# Altium PCB pcb_corin.pcbdoc (part 1 of 2)
Units mil, origin at the board's own origin, x right, y up, seen from the top; angles counter-clockwise.
Board outline 13525.17 x 6011.41 mil, 2 copper layers (Top Layer, Bottom Layer); 275 components, 170 nets, 950 pads, 596 vias.
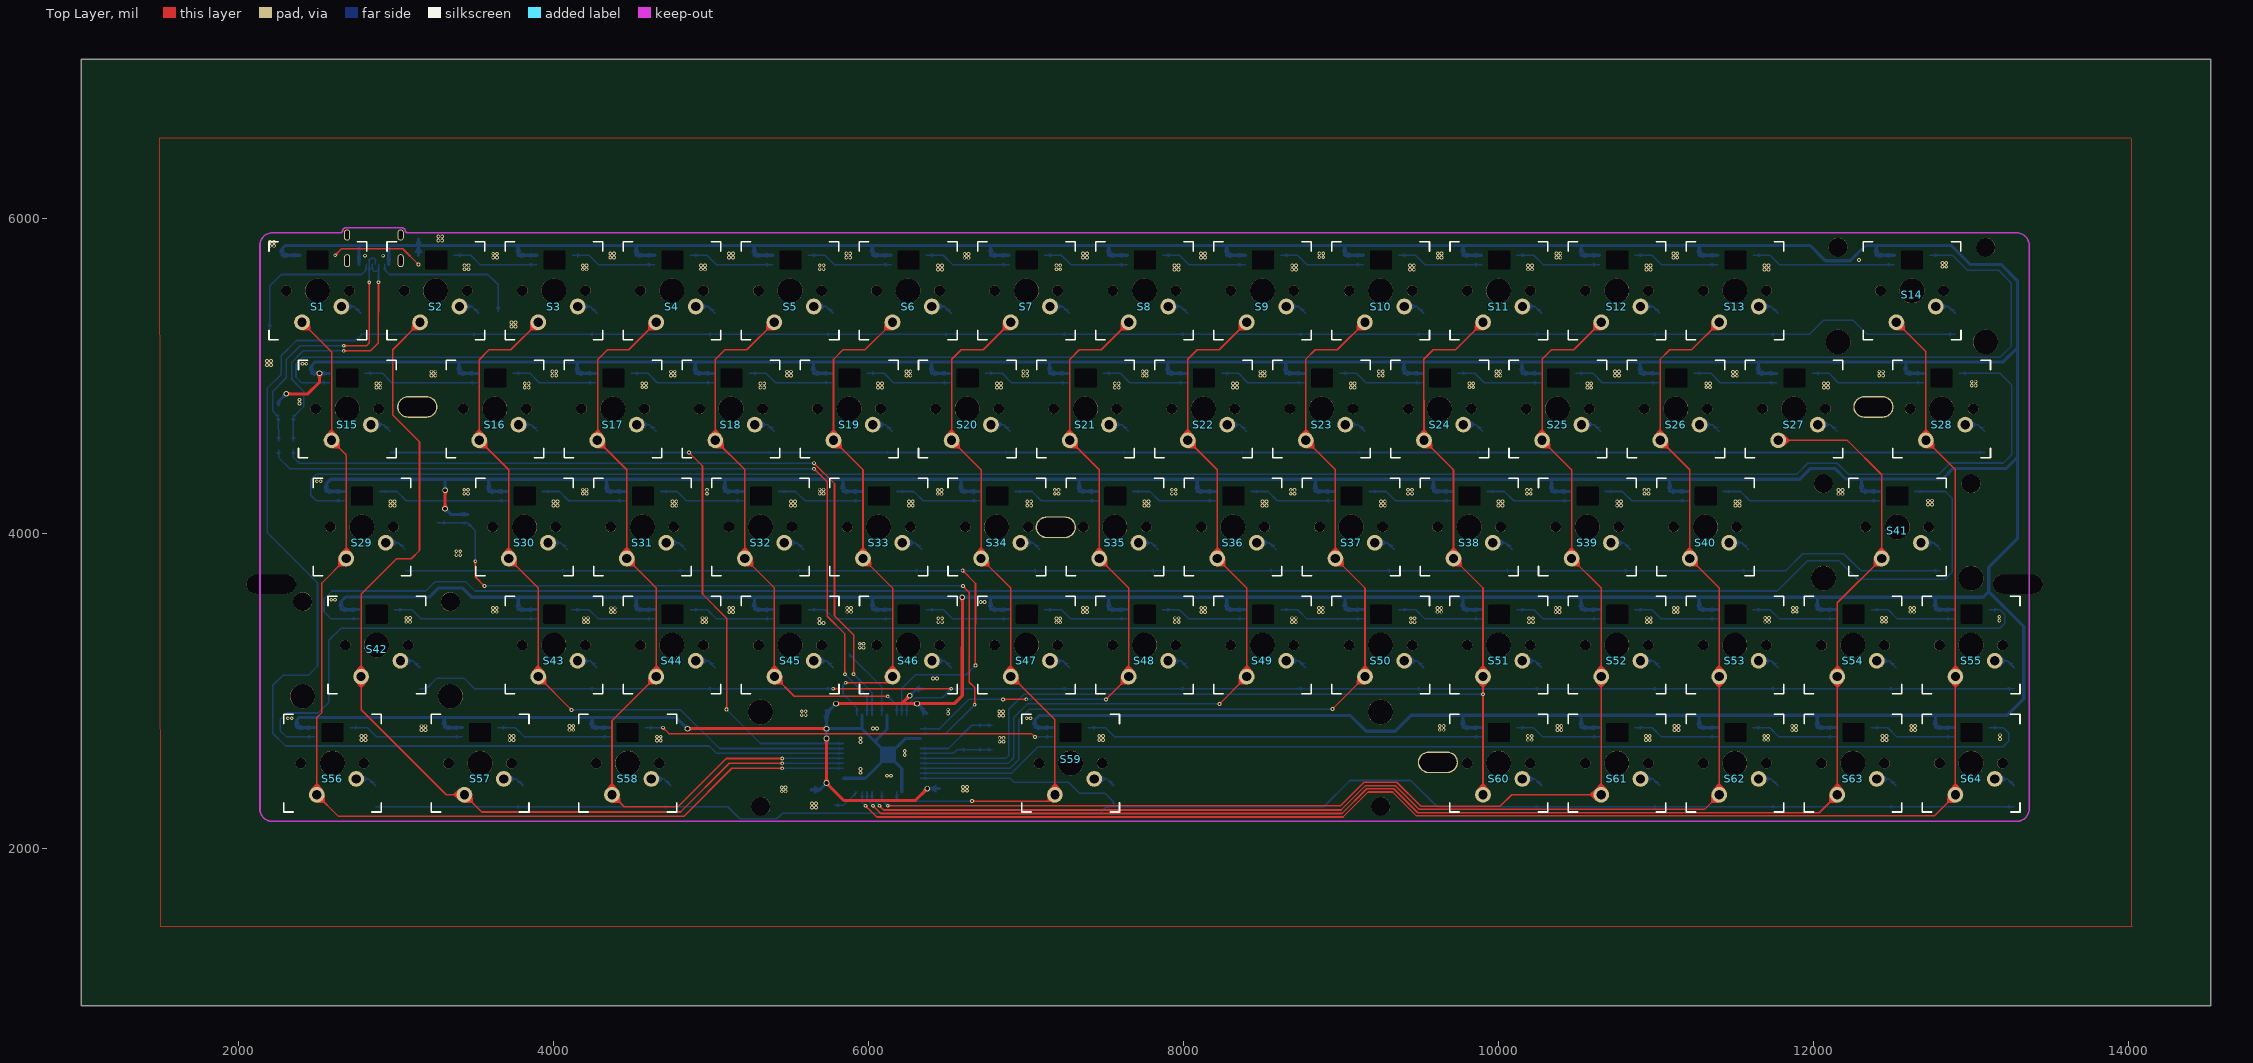
[diagram p0: Top Layer view]
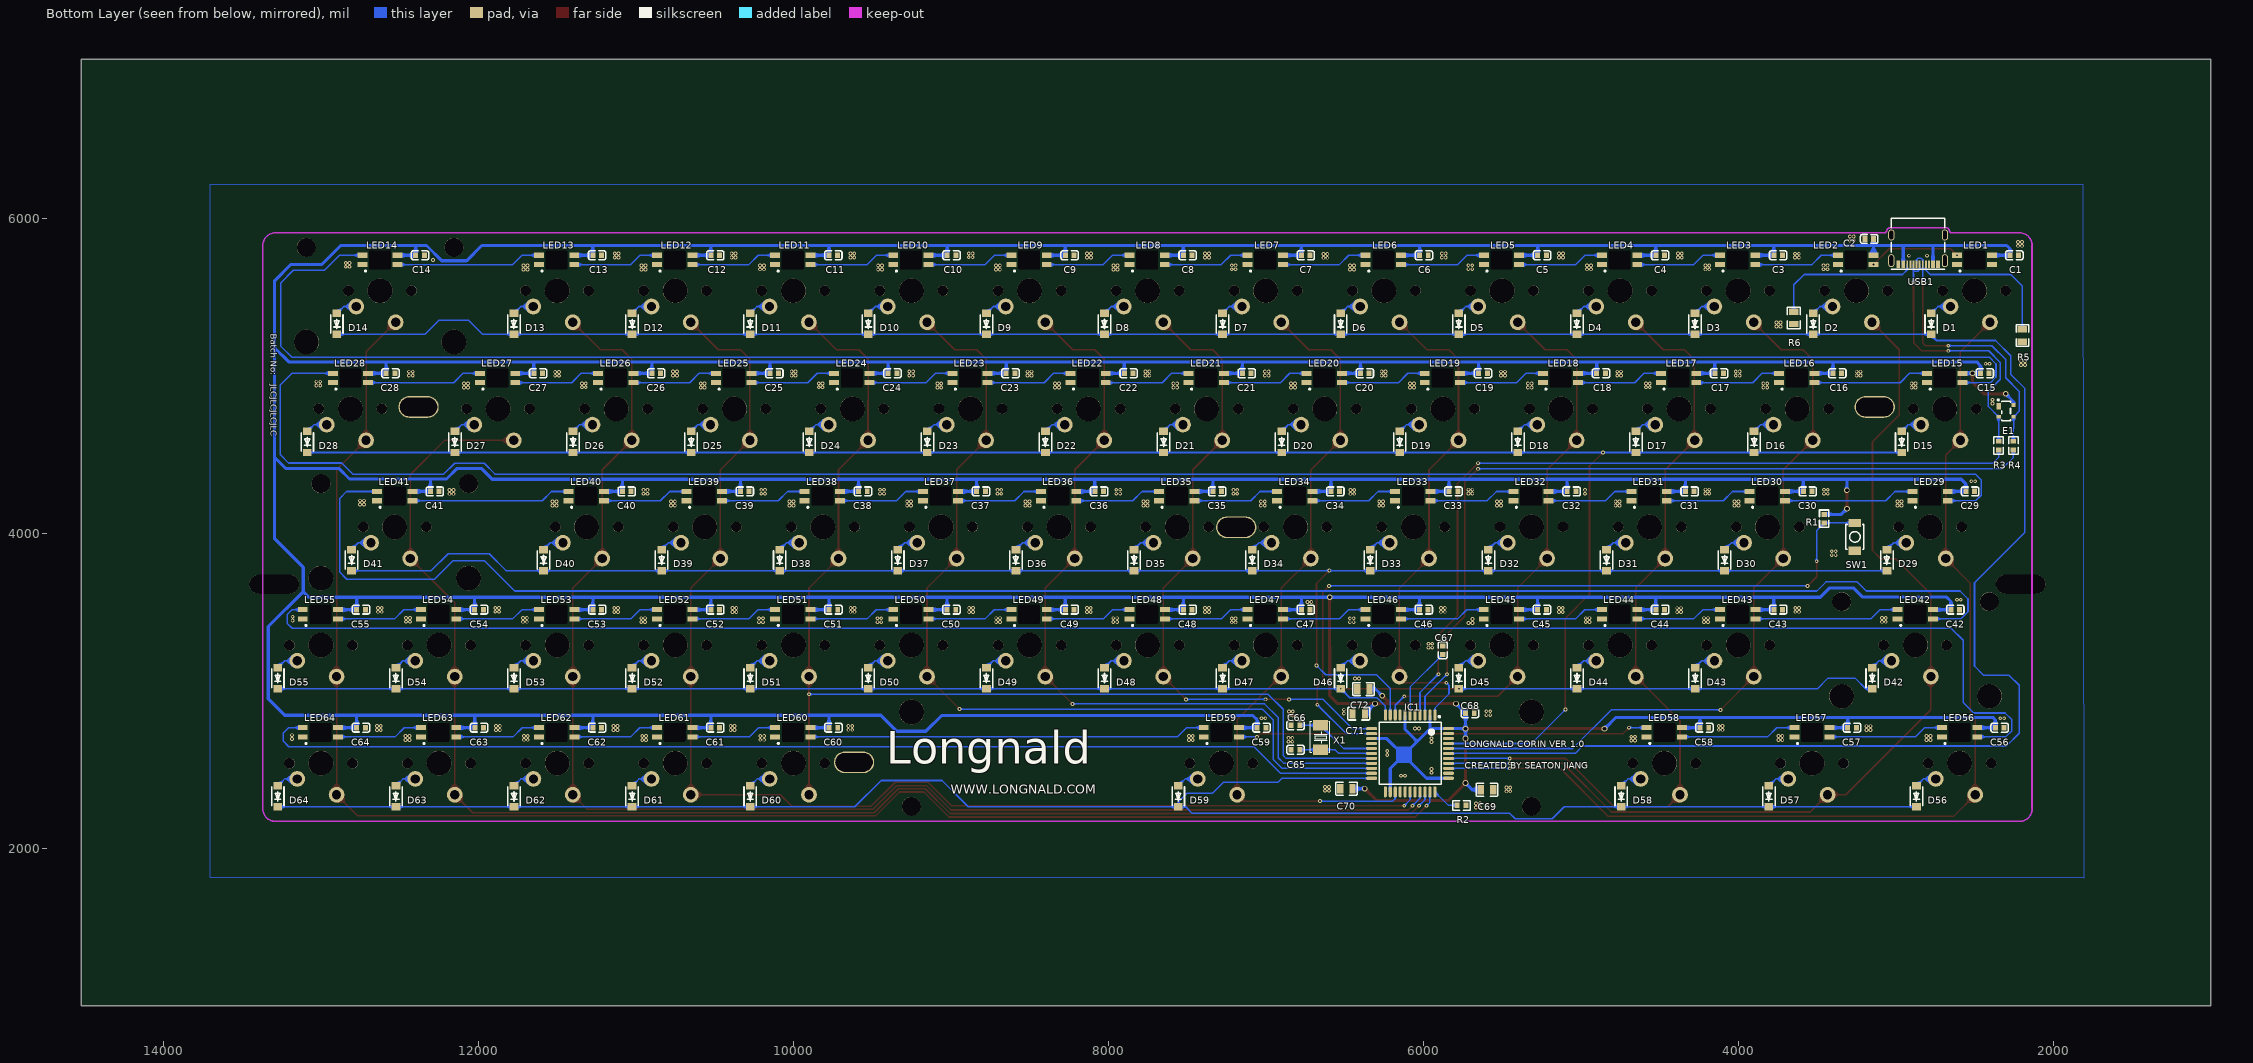
[diagram p1: Bottom Layer view, seen from below]

## Layer stack, top to bottom
Top Layer: signal copper (thickness not stored)
Dielectric: dielectric 12.6, FR-4, Dk 4.8
Bottom Layer: signal copper (thickness not stored)

## Board outline
14525.17,1000 1000,1000 1000,7011.41 14525.17,7011.41

## Components (designator, comment, footprint, x,y, rotation, side; value= is the part's Value field where it differs from the comment)
C1 "100nF" C0603 2248.03,5765.74 r180 bottom
C2 "100nF" C0603 3170.47,5868.89 r0 bottom
C3 "100nF" C0603 3748.03,5765.74 r180 bottom
C4 "100nF" C0603 4497.63,5765.74 r180 bottom
C5 "100nF" C0603 5247.63,5765.74 r180 bottom
C6 "100nF" C0603 5997.63,5765.74 r180 bottom
C7 "100nF" C0603 6748.02,5765.74 r180 bottom
C8 "100nF" C0603 7498.02,5765.74 r180 bottom
C9 "100nF" C0603 8247.62,5765.74 r180 bottom
C10 "100nF" C0603 8997.62,5765.74 r180 bottom
C11 "100nF" C0603 9748.01,5765.74 r180 bottom
C12 "100nF" C0603 10498.01,5765.74 r180 bottom
C13 "100nF" C0603 11248.01,5765.74 r180 bottom
C14 "100nF" C0603 12372.81,5765.74 r180 bottom
C15 "100nF" C0603 2435.43,5016.53 r180 bottom
C16 "100nF" C0603 3372.44,5016.53 r180 bottom
C17 "100nF" C0603 4122.83,5016.53 r180 bottom
C18 "100nF" C0603 4872.83,5016.53 r180 bottom
C19 "100nF" C0603 5622.83,5016.53 r180 bottom
C20 "100nF" C0603 6372.82,5016.53 r180 bottom
C21 "100nF" C0603 7122.82,5016.53 r180 bottom
C22 "100nF" C0603 7872.82,5016.53 r180 bottom
C23 "100nF" C0603 8622.82,5016.53 r180 bottom
C24 "100nF" C0603 9372.82,5016.53 r180 bottom
C25 "100nF" C0603 10122.82,5016.53 r180 bottom
C26 "100nF" C0603 10872.82,5016.53 r180 bottom
C27 "100nF" C0603 11622.82,5016.53 r180 bottom
C28 "100nF" C0603 12560.21,5016.53 r180 bottom
C29 "100nF" C0603 2529.13,4266.53 r180 bottom
C30 "100nF" C0603 3560.23,4266.53 r180 bottom
C31 "100nF" C0603 4310.23,4266.53 r180 bottom
C32 "100nF" C0603 5059.84,4266.53 r180 bottom
C33 "100nF" C0603 5810.23,4266.53 r180 bottom
C34 "100nF" C0603 6560.23,4266.53 r180 bottom
C35 "100nF" C0603 7310.22,4266.53 r180 bottom
C36 "100nF" C0603 8060.22,4266.53 r180 bottom
C37 "100nF" C0603 8810.22,4266.53 r180 bottom
C38 "100nF" C0603 9560.22,4266.53 r180 bottom
C39 "100nF" C0603 10310.22,4266.53 r180 bottom
C40 "100nF" C0603 11060.22,4266.53 r180 bottom
C41 "100nF" C0603 12279.11,4266.53 r180 bottom
C42 "100nF" C0603 2622.83,3515.74 r180 bottom
C43 "100nF" C0603 3747.63,3515.74 r180 bottom
C44 "100nF" C0603 4497.63,3515.74 r180 bottom
C45 "100nF" C0603 5248.02,3515.74 r180 bottom
C46 "100nF" C0603 5998.42,3515.74 r180 bottom
C47 "100nF" C0603 6748.02,3515.74 r180 bottom
C48 "100nF" C0603 7497.63,3515.74 r180 bottom
C49 "100nF" C0603 8247.62,3515.74 r180 bottom
C50 "100nF" C0603 8998.41,3515.74 r180 bottom
C51 "100nF" C0603 9747.62,3515.74 r180 bottom
C52 "100nF" C0603 10498.01,3515.74 r180 bottom
C53 "100nF" C0603 11247.62,3515.74 r180 bottom
C54 "100nF" C0603 11998.01,3515.74 r180 bottom
C55 "100nF" C0603 12747.61,3515.74 r180 bottom
C56 "100nF" C0603 2341.73,2765.74 r180 bottom
C57 "100nF" C0603 3279.13,2766.14 r180 bottom
C58 "100nF" C0603 4216.53,2766.14 r180 bottom
C59 "100nF" C0603 7029.12,2766.14 r180 bottom
C60 "100nF" C0603 9747.62,2766.14 r180 bottom
C61 "100nF" C0603 10498.01,2766.14 r180 bottom
C62 "100nF" C0603 11247.62,2766.14 r180 bottom
C63 "100nF" C0603 11997.62,2766.14 r180 bottom
C64 "100nF" C0603 12747.62,2766.14 r180 bottom
C65 "22pF" C0603 6812.98,2625.98 r180 bottom
C66 "22pF" C0603 6812.98,2781.1 r180 bottom
C67 "1uF" C0603 5878.73,3257.87 r90 bottom
C68 "1uF" C0603 5705.5,2857.87 r180 bottom
C69 "100nF" C0805 5597.24,2371.65 r180 bottom
C70 "100nF" C0805 6489.75,2378.34 r0 bottom
C71 "100nF" C0805 6411.41,2855.11 r0 bottom
C72 "100nF" C0805 6381.88,3011.02 r0 bottom
D1 "1N4148" SOD-123_L2.8-W1.8-LS3.7-RD 2776.38,5329.91 r270 bottom
D2 "1N4148" SOD-123_L2.8-W1.8-LS3.7-RD 3525.98,5329.91 r270 bottom
D3 "1N4148" SOD-123_L2.8-W1.8-LS3.7-RD 4276.37,5329.91 r270 bottom
D4 "1N4148" SOD-123_L2.8-W1.8-LS3.7-RD 5025.98,5329.91 r270 bottom
D5 "1N4148" SOD-123_L2.8-W1.8-LS3.7-RD 5775.98,5329.91 r270 bottom
D6 "1N4148" SOD-123_L2.8-W1.8-LS3.7-RD 6525.97,5329.91 r270 bottom
D7 "1N4148" SOD-123_L2.8-W1.8-LS3.7-RD 7276.37,5329.91 r270 bottom
D8 "1N4148" SOD-123_L2.8-W1.8-LS3.7-RD 8026.36,5329.91 r270 bottom
D9 "1N4148" SOD-123_L2.8-W1.8-LS3.7-RD 8775.97,5329.91 r270 bottom
D10 "1N4148" SOD-123_L2.8-W1.8-LS3.7-RD 9525.97,5329.91 r270 bottom
D11 "1N4148" SOD-123_L2.8-W1.8-LS3.7-RD 10276.36,5329.91 r270 bottom
D12 "1N4148" SOD-123_L2.8-W1.8-LS3.7-RD 11026.36,5329.91 r270 bottom
D13 "1N4148" SOD-123_L2.8-W1.8-LS3.7-RD 11776.36,5329.91 r270 bottom
D14 "1N4148" SOD-123_L2.8-W1.8-LS3.7-RD 12901.16,5329.91 r270 bottom
D15 "1N4148" SOD-123_L2.8-W1.8-LS3.7-RD 2963.78,4579.91 r270 bottom
D16 "1N4148" SOD-123_L2.8-W1.8-LS3.7-RD 3901.18,4579.91 r270 bottom
D17 "1N4148" SOD-123_L2.8-W1.8-LS3.7-RD 4651.18,4579.91 r270 bottom
D18 "1N4148" SOD-123_L2.8-W1.8-LS3.7-RD 5401.17,4579.91 r270 bottom
D19 "1N4148" SOD-123_L2.8-W1.8-LS3.7-RD 6151.17,4579.91 r270 bottom
D20 "1N4148" SOD-123_L2.8-W1.8-LS3.7-RD 6901.17,4579.91 r270 bottom
D21 "1N4148" SOD-123_L2.8-W1.8-LS3.7-RD 7651.17,4579.91 r270 bottom
D22 "1N4148" SOD-123_L2.8-W1.8-LS3.7-RD 8401.17,4579.91 r270 bottom
D23 "1N4148" SOD-123_L2.8-W1.8-LS3.7-RD 9151.17,4579.91 r270 bottom
D24 "1N4148" SOD-123_L2.8-W1.8-LS3.7-RD 9901.16,4579.91 r270 bottom
D25 "1N4148" SOD-123_L2.8-W1.8-LS3.7-RD 10651.16,4579.91 r270 bottom
D26 "1N4148" SOD-123_L2.8-W1.8-LS3.7-RD 11401.16,4579.91 r270 bottom
D27 "1N4148" SOD-123_L2.8-W1.8-LS3.7-RD 12151.16,4579.91 r270 bottom
D28 "1N4148" SOD-123_L2.8-W1.8-LS3.7-RD 13088.56,4579.91 r270 bottom
D29 "1N4148" SOD-123_L2.8-W1.8-LS3.7-RD 3057.48,3829.92 r270 bottom
D30 "1N4148" SOD-123_L2.8-W1.8-LS3.7-RD 4088.58,3829.92 r270 bottom
D31 "1N4148" SOD-123_L2.8-W1.8-LS3.7-RD 4838.18,3829.92 r270 bottom
D32 "1N4148" SOD-123_L2.8-W1.8-LS3.7-RD 5588.57,3829.92 r270 bottom
D33 "1N4148" SOD-123_L2.8-W1.8-LS3.7-RD 6338.57,3829.92 r270 bottom
D34 "1N4148" SOD-123_L2.8-W1.8-LS3.7-RD 7088.57,3829.92 r270 bottom
D35 "1N4148" SOD-123_L2.8-W1.8-LS3.7-RD 7838.57,3829.92 r270 bottom
D36 "1N4148" SOD-123_L2.8-W1.8-LS3.7-RD 8588.57,3829.92 r270 bottom
D37 "1N4148" SOD-123_L2.8-W1.8-LS3.7-RD 9338.57,3829.92 r270 bottom
D38 "1N4148" SOD-123_L2.8-W1.8-LS3.7-RD 10088.57,3829.92 r270 bottom
D39 "1N4148" SOD-123_L2.8-W1.8-LS3.7-RD 10838.56,3829.92 r270 bottom
D40 "1N4148" SOD-123_L2.8-W1.8-LS3.7-RD 11588.56,3829.92 r270 bottom
D41 "1N4148" SOD-123_L2.8-W1.8-LS3.7-RD 12807.46,3829.92 r270 bottom
D42 "1N4148" SOD-123_L2.8-W1.8-LS3.7-RD 3150.78,3079.92 r270 bottom
D43 "1N4148" SOD-123_L2.8-W1.8-LS3.7-RD 4275.59,3079.92 r270 bottom
D44 "1N4148" SOD-123_L2.8-W1.8-LS3.7-RD 5025.58,3079.92 r270 bottom
D45 "1N4148" SOD-123_L2.8-W1.8-LS3.7-RD 5775.98,3079.92 r270 bottom
D46 "1N4148" SOD-123_L2.8-W1.8-LS3.7-RD 6525.98,3079.92 r270 bottom
D47 "1N4148" SOD-123_L2.8-W1.8-LS3.7-RD 7276.37,3079.92 r270 bottom
D48 "1N4148" SOD-123_L2.8-W1.8-LS3.7-RD 8025.97,3079.92 r270 bottom
D49 "1N4148" SOD-123_L2.8-W1.8-LS3.7-RD 8775.97,3079.92 r270 bottom
D50 "1N4148" SOD-123_L2.8-W1.8-LS3.7-RD 9526.36,3079.92 r270 bottom
D51 "1N4148" SOD-123_L2.8-W1.8-LS3.7-RD 10275.97,3079.92 r270 bottom
D52 "1N4148" SOD-123_L2.8-W1.8-LS3.7-RD 11026.36,3079.92 r270 bottom
D53 "1N4148" SOD-123_L2.8-W1.8-LS3.7-RD 11775.96,3079.92 r270 bottom
D54 "1N4148" SOD-123_L2.8-W1.8-LS3.7-RD 12525.96,3079.92 r270 bottom
D55 "1N4148" SOD-123_L2.8-W1.8-LS3.7-RD 13275.96,3079.92 r270 bottom
D56 "1N4148" SOD-123_L2.8-W1.8-LS3.7-RD 2870.08,2329.92 r270 bottom
D57 "1N4148" SOD-123_L2.8-W1.8-LS3.7-RD 3807.08,2329.92 r270 bottom
D58 "1N4148" SOD-123_L2.8-W1.8-LS3.7-RD 4744.88,2329.92 r270 bottom
D59 "1N4148" SOD-123_L2.8-W1.8-LS3.7-RD 7557.47,2329.92 r270 bottom
D60 "1N4148" SOD-123_L2.8-W1.8-LS3.7-RD 10275.97,2329.92 r270 bottom
D61 "1N4148" SOD-123_L2.8-W1.8-LS3.7-RD 11026.36,2329.92 r270 bottom
D62 "1N4148" SOD-123_L2.8-W1.8-LS3.7-RD 11775.96,2329.92 r270 bottom
D63 "1N4148" SOD-123_L2.8-W1.8-LS3.7-RD 12525.96,2329.92 r270 bottom
D64 "1N4148" SOD-123_L2.8-W1.8-LS3.7-RD 13275.96,2329.92 r270 bottom
E1 "PRTR5V0U2X" SOT-143_L2.9-W1.3-P1.92-LS2.3-BL 2300.39,4776.77 r90 bottom
IC1 "ATMEGA32U4-AU" QFP-44_L10.0-W10.0-P0.80-LS13.2-BL 6085.42,2601.97 r180 bottom
LED1 "WS2812B" WS2812-3528 2501.18,5736.21 r0 top
LED2 "WS2812B" WS2812-3528 3255.24,5736.09 r0 top
LED3 "WS2812B" WS2812-3528 4005.64,5736.09 r0 top
LED4 "WS2812B" WS2812-3528 4755.24,5736.09 r0 top
LED5 "WS2812B" WS2812-3528 5505.24,5736.09 r0 top
LED6 "WS2812B" WS2812-3528 6255.24,5736.09 r0 top
LED7 "WS2812B" WS2812-3528 7005.63,5736.09 r0 top
LED8 "WS2812B" WS2812-3528 7755.63,5736.09 r0 top
LED9 "WS2812B" WS2812-3528 8505.23,5736.09 r0 top
LED10 "WS2812B" WS2812-3528 9255.24,5736.09 r0 top
LED11 "WS2812B" WS2812-3528 10005.63,5736.09 r0 top
LED12 "WS2812B" WS2812-3528 10755.62,5736.09 r0 top
LED13 "WS2812B" WS2812-3528 11505.62,5736.09 r0 top
LED14 "WS2812B" WS2812-3528 12627.14,5736.09 r0 top
LED15 "WS2812B" WS2812-3528 2689.76,4986.21 r0 top
LED16 "WS2812B" WS2812-3528 3630.44,4986.21 r0 top
LED17 "WS2812B" WS2812-3528 4380.44,4986.21 r0 top
LED18 "WS2812B" WS2812-3528 5130.44,4986.21 r0 top
LED19 "WS2812B" WS2812-3528 5880.44,4986.21 r0 top
LED20 "WS2812B" WS2812-3528 6630.44,4986.21 r0 top
LED21 "WS2812B" WS2812-3528 7380.43,4986.21 r0 top
LED22 "WS2812B" WS2812-3528 8130.43,4986.21 r0 top
LED23 "WS2812B" WS2812-3528 8880.43,4986.21 r0 top
LED24 "WS2812B" WS2812-3528 9630.43,4986.21 r0 top
LED25 "WS2812B" WS2812-3528 10380.42,4986.21 r0 top
LED26 "WS2812B" WS2812-3528 11130.42,4986.21 r0 top
LED27 "WS2812B" WS2812-3528 11880.43,4986.21 r0 top
LED28 "WS2812B" WS2812-3528 12814.54,4986.21 r0 top
LED29 "WS2812B" WS2812-3528 2783.41,4236.09 r0 top
LED30 "WS2812B" WS2812-3528 3817.84,4236.09 r0 top
LED31 "WS2812B" WS2812-3528 4567.84,4236.09 r0 top
LED32 "WS2812B" WS2812-3528 5317.84,4236.09 r0 top
LED33 "WS2812B" WS2812-3528 6067.84,4236.09 r0 top
LED34 "WS2812B" WS2812-3528 6817.84,4236.09 r0 top
LED35 "WS2812B" WS2812-3528 7567.83,4236.09 r0 top
LED36 "WS2812B" WS2812-3528 8317.83,4236.09 r0 top
LED37 "WS2812B" WS2812-3528 9067.83,4236.09 r0 top
LED38 "WS2812B" WS2812-3528 9817.83,4236.09 r0 top
LED39 "WS2812B" WS2812-3528 10567.83,4236.09 r0 top
LED40 "WS2812B" WS2812-3528 11317.83,4236.09 r0 top
LED41 "WS2812B" WS2812-3528 12533.44,4236.09 r0 top
LED42 "WS2812B" WS2812-3528 2877.16,3485.82 r0 top
LED43 "WS2812B" WS2812-3528 4005.25,3485.82 r0 top
LED44 "WS2812B" WS2812-3528 4755.24,3485.82 r0 top
LED45 "WS2812B" WS2812-3528 5505.64,3485.82 r0 top
LED46 "WS2812B" WS2812-3528 6255.63,3485.82 r0 top
LED47 "WS2812B" WS2812-3528 7005.63,3485.82 r0 top
LED48 "WS2812B" WS2812-3528 7755.24,3485.82 r0 top
LED49 "WS2812B" WS2812-3528 8505.23,3485.82 r0 top
LED50 "WS2812B" WS2812-3528 9255.63,3485.82 r0 top
LED51 "WS2812B" WS2812-3528 10005.23,3485.82 r0 top
LED52 "WS2812B" WS2812-3528 10755.62,3485.82 r0 top
LED53 "WS2812B" WS2812-3528 11505.23,3485.82 r0 top
LED54 "WS2812B" WS2812-3528 12255.23,3485.82 r0 top
LED55 "WS2812B" WS2812-3528 13005.23,3485.82 r0 top
LED56 "WS2812B" WS2812-3528 2596.01,2736.22 r0 top
LED57 "WS2812B" WS2812-3528 3533.41,2736.22 r0 top
LED58 "WS2812B" WS2812-3528 4470.81,2736.22 r0 top
LED59 "WS2812B" WS2812-3528 7283.45,2736.22 r0 top
LED60 "WS2812B" WS2812-3528 10005.23,2736.22 r0 top
LED61 "WS2812B" WS2812-3528 10755.62,2736.22 r0 top
LED62 "WS2812B" WS2812-3528 11505.23,2736.22 r0 top
LED63 "WS2812B" WS2812-3528 12255.23,2736.22 r0 top
LED64 "WS2812B" WS2812-3528 13005.23,2736.22 r0 top
R1 "10KΩ" R0603 3455.9,4092.91 r270 bottom
R2 "10KΩ" R0603 5758.65,2272.05 r180 bottom
R3 "22Ω" R0603 2348.42,4557.08 r270 bottom
R4 "22Ω" R0603 2253.94,4557.08 r270 bottom
R5 "5.1KΩ" R0805 2196.85,5255.9 r270 bottom
R6 "5.1KΩ" R0805 3649.21,5367.71 r270 bottom
S1 "MX-1U" CHERRY-MX-1U 2502.36,5540.15 r0 top
S2 "MX-1U" CHERRY-MX-1U 3251.97,5540.15 r0 top
S3 "MX-1U" CHERRY-MX-1U 4002.36,5540.15 r0 top
S4 "MX-1U" CHERRY-MX-1U 4751.96,5540.15 r0 top
S5 "MX-1U" CHERRY-MX-1U 5501.96,5540.15 r0 top
S6 "MX-1U" CHERRY-MX-1U 6251.96,5540.15 r0 top
S7 "MX-1U" CHERRY-MX-1U 7002.35,5540.15 r0 top
S8 "MX-1U" CHERRY-MX-1U 7752.35,5540.15 r0 top
S9 "MX-1U" CHERRY-MX-1U 8501.95,5540.15 r0 top
S10 "MX-1U" CHERRY-MX-1U 9251.95,5540.15 r0 top
S11 "MX-1U" CHERRY-MX-1U 10002.34,5540.15 r0 top
S12 "MX-1U" CHERRY-MX-1U 10752.34,5540.15 r0 top
S13 "MX-1U" CHERRY-MX-1U 11502.34,5540.15 r0 top
S14 "MX-2U" CHERRY-MX-2U 12627.14,5540.15 r0 top
S15 "MX-1.5U" CHERRY-MX-1.5U 2689.76,4790.15 r0 top
S16 "MX-1U" CHERRY-MX-1U 3627.16,4790.15 r0 top
S17 "MX-1U" CHERRY-MX-1U 4377.16,4790.15 r0 top
S18 "MX-1U" CHERRY-MX-1U 5127.16,4790.15 r0 top
S19 "MX-1U" CHERRY-MX-1U 5877.16,4790.15 r0 top
S20 "MX-1U" CHERRY-MX-1U 6627.15,4790.15 r0 top
S21 "MX-1U" CHERRY-MX-1U 7377.15,4790.15 r0 top
S22 "MX-1U" CHERRY-MX-1U 8127.15,4790.15 r0 top
S23 "MX-1U" CHERRY-MX-1U 8877.15,4790.15 r0 top
S24 "MX-1U" CHERRY-MX-1U 9627.15,4790.15 r0 top
S25 "MX-1U" CHERRY-MX-1U 10377.15,4790.15 r0 top
S26 "MX-1U" CHERRY-MX-1U 11127.15,4790.15 r0 top
S27 "MX-1U" CHERRY-MX-1U 11877.15,4790.15 r0 top
S28 "MX-1.5U" CHERRY-MX-1.5U 12814.54,4790.15 r0 top
S29 "MX-1.75U" CHERRY-MX-1.75U 2783.46,4040.15 r0 top
S30 "MX-1U" CHERRY-MX-1U 3814.56,4040.16 r0 top
S31 "MX-1U" CHERRY-MX-1U 4564.56,4040.16 r0 top
S32 "MX-1U" CHERRY-MX-1U 5314.56,4040.15 r0 top
S33 "MX-1U" CHERRY-MX-1U 6064.56,4040.15 r0 top
S34 "MX-1U" CHERRY-MX-1U 6814.56,4040.15 r0 top
S35 "MX-1U" CHERRY-MX-1U 7564.56,4040.15 r0 top
S36 "MX-1U" CHERRY-MX-1U 8314.55,4040.15 r0 top
S37 "MX-1U" CHERRY-MX-1U 9064.55,4040.15 r0 top
S38 "MX-1U" CHERRY-MX-1U 9814.55,4040.15 r0 top
S39 "MX-1U" CHERRY-MX-1U 10564.55,4040.15 r0 top
S40 "MX-1U" CHERRY-MX-1U 11314.55,4040.15 r0 top
S41 "MX-2.25U" CHERRY-MX-2.25U 12533.44,4040.15 r0 top
S42 "MX-2U" CHERRY-MX-2U 2877.16,3290.15 r0 top
S43 "MX-1U" CHERRY-MX-1U 4001.96,3290.15 r0 top
S44 "MX-1U" CHERRY-MX-1U 4751.96,3290.15 r0 top
S45 "MX-1U" CHERRY-MX-1U 5502.35,3290.15 r0 top
S46 "MX-1U" CHERRY-MX-1U 6252.35,3290.15 r0 top
S47 "MX-1U" CHERRY-MX-1U 7002.35,3290.15 r0 top
S48 "MX-1U" CHERRY-MX-1U 7751.96,3290.15 r0 top
S49 "MX-1U" CHERRY-MX-1U 8501.95,3290.15 r0 top
S50 "MX-1U" CHERRY-MX-1U 9252.35,3290.15 r0 top
S51 "MX-1U" CHERRY-MX-1U 10001.95,3290.15 r0 top
S52 "MX-1U" CHERRY-MX-1U 10752.34,3290.15 r0 top
S53 "MX-1U" CHERRY-MX-1U 11501.95,3290.15 r0 top
S54 "MX-1U" CHERRY-MX-1U 12251.95,3290.15 r0 top
S55 "MX-1U" CHERRY-MX-1U 13001.94,3290.15 r0 top
S56 "MX-1.25U" CHERRY-MX-1.25U 2596.06,2540.16 r0 top
S57 "MX-1.25U" CHERRY-MX-1.25U 3533.46,2540.16 r0 top
S58 "MX-1.25U" CHERRY-MX-1.25U 4470.86,2540.16 r0 top
S59 "MX-6.25U" CHERRY-MX-6.25U 7283.45,2540.16 r0 top
S60 "MX-1U" CHERRY-MX-1U 10001.95,2540.16 r0 top
S61 "MX-1U" CHERRY-MX-1U 10752.34,2540.16 r0 top
S62 "MX-1U" CHERRY-MX-1U 11501.95,2540.16 r0 top
S63 "MX-1U" CHERRY-MX-1U 12251.95,2540.16 r0 top
S64 "MX-1U" CHERRY-MX-1U 13001.95,2540.16 r0 top
SW1 "TS-1088R-02026" SW-SMD_L3.9-W3.0-P4.45 3260.63,3977.16 r270 bottom
USB1 "TYPE-C" USB-C-SMD_TYPE-C16PIN 2859.45,5801.56 r180 bottom
X1 "16MHz" OSC-SMD_2P-L5.0-W3.2 6655.5,2703.93 r90 bottom

## Footprints (in the part's own frame and the unit in brackets; to place one, negate y for a bottom-side part, rotate by r counter-clockwise, add the part's x,y. Pads: shape width x height; smd on the part's side, far side on the other; paste and mask are expansions set on the pad)
C0603 [mm]
  rect 0.8x0.9 smd: 1(0.7,0) 2(-0.7,0)
  silkscreen extent -1.4,-0.72 1.4,0.7
C0805 [mm]
  rect 1x1.55 smd: 1(1,0) 2(-1,0)
  silkscreen extent -1.75,-1.04 1.75,1.04
CHERRY-MX-1.5U [mm]
  round 2.54 hole 1.499: COL(3.829,-2.539) ROW(-2.521,-5.079)
  round 1.7 hole 1.7 unplated: ""(-5.08,0) ""(5.08,0)
  round 4 hole 4 unplated: ""(0,0)
  silkscreen extent -7.85,-7.87 7.89,7.87
CHERRY-MX-1.25U [mm]
  round 2.54 hole 1.499: COL(3.829,-2.539) ROW(-2.521,-5.079)
  round 1.7 hole 1.7 unplated: ""(-5.08,0) ""(5.08,0)
  round 4 hole 4 unplated: ""(0,0)
  silkscreen extent -7.85,-7.87 7.89,7.87
CHERRY-MX-1.75U [mil]
  round 100 hole 59: COL(150.75,-99.96) ROW(-99.25,-199.96)
  round 66.93 hole 66.93 unplated: ""(-200,0) ""(200,0)
  round 157.48 hole 157.48 unplated: ""(0,0)
  silkscreen extent -309,-310 311,310
CHERRY-MX-1U [mil]
  round 100 hole 59: COL(150.75,-99.96) ROW(-99.25,-199.96)
  round 66.93 hole 66.93 unplated: ""(-200,0) ""(200,0)
  round 157.48 hole 157.48 unplated: ""(0,0)
  silkscreen extent -309,-310 311,310
CHERRY-MX-2.25U [mil]
  round 100 hole 59: COL(150.75,-99.96) ROW(-99.25,-199.96)
  round 157 hole 157 unplated: ""(-468.7,-325) ""(468.9,-325)
  round 120 hole 120 unplated: ""(-468.7,275) ""(468.9,275)
  round 66.93 hole 66.93 unplated: ""(-200,0) ""(200,0)
  round 157.48 hole 157.48 unplated: ""(0,0)
  silkscreen extent -309,-310 311,310
CHERRY-MX-2U [mil]
  round 100 hole 59: COL(150.75,-99.96) ROW(-99.25,-199.96)
  round 157 hole 157 unplated: ""(-470,-325.01) ""(467.6,-325.01)
  round 120 hole 120 unplated: ""(-470,274.99) ""(467.6,274.99)
  round 66.93 hole 66.93 unplated: ""(-200,-0.01) ""(200,-0.01)
  round 157.48 hole 157.48 unplated: ""(0,-0.01)
  silkscreen extent -309,-310 311,310
CHERRY-MX-6.25U [mil]
  round 100 hole 59: COL(150.75,-99.96) ROW(-99.25,-199.96)
  round 120 hole 120 unplated: ""(-1968.5,-275) ""(1968.5,-275)
  round 160 hole 160 unplated: ""(-1968.5,325) ""(1968.5,325)
  round 66.93 hole 66.93 unplated: ""(-200,0) ""(200,0)
  round 157.48 hole 157.48 unplated: ""(0,0)
  silkscreen extent -309,-310 311,310
OSC-SMD_2P-L5.0-W3.2 [mil]
  rect 66.92x94.48 smd: 1(77.18,-0.02) 2(-77.18,0.02)
  silkscreen extent -98,-61 99,66
QFP-44_L10.0-W10.0-P0.80-LS13.2-BL [mm]
  oval 0.5x1.8 smd: 1(4,6.2) 2(3.2,6.2) 3(2.4,6.2) 4(1.6,6.2) 5(0.8,6.2) 6(0,6.2) 7(-0.8,6.2) 8(-1.6,6.2) 9(-2.4,6.2) 10(-3.2,6.2) 11(-4,6.2) 23(-4,-6.2) 24(-3.2,-6.2) 25(-2.4,-6.2) 26(-1.6,-6.2) 27(-0.8,-6.2) 28(0,-6.2) 29(0.8,-6.2) 30(1.6,-6.2) 31(2.4,-6.2) 32(3.2,-6.2) 33(4,-6.2)
  oval 1.8x0.5 smd: 12(-6.2,4) 13(-6.2,3.2) 14(-6.2,2.4) 15(-6.2,1.6) 16(-6.2,0.8) 17(-6.2,0) 18(-6.2,-0.8) 19(-6.2,-1.6) 20(-6.2,-2.4) 21(-6.2,-3.2) 22(-6.2,-4) 34(6.2,-4) 35(6.2,-3.2) 36(6.2,-2.4) 37(6.2,-1.6) 38(6.2,-0.8) 39(6.2,0) 40(6.2,0.8) 41(6.2,1.6) 42(6.2,2.4) 43(6.2,3.2) 44(6.2,4)
  silkscreen extent -5,-5 5,6.08
R0603 [mm]
  rect 0.8x0.9 smd: 1(0.7,0) 2(-0.7,0)
  silkscreen extent -1.4,-0.76 1.4,0.75
R0805 [mm]
  rect 1x1.55 smd: 1(1,0) 2(-1,0)
  silkscreen extent -1.75,-1.02 1.75,1.02
SOD-123_L2.8-W1.8-LS3.7-RD [mm]
  rect 1.2x1.4 smd: 1(1.7,0) 2(-1.7,0)
  silkscreen extent -1.5,-1 1.5,1
SOT-143_L2.9-W1.3-P1.92-LS2.3-BL [mm]
  rect 1.1x0.7 smd: 1(0.75,1.2)
  rect 0.6x0.7 smd: 2(-0.95,1.2) 3(-0.95,-1.2) 4(0.95,-1.2)
  silkscreen extent -1.55,-0.7 1.9,1.4
SW-SMD_L3.9-W3.0-P4.45 [mm]
  rect 1.35x2 smd: 1(2.25,0) 2(-2.25,0)
  silkscreen extent -2,-1.45 2,1.45
USB-C-SMD_TYPE-C16PIN [mm]
  oval 1x2.099 hole 0.6 slot 1.7 at 90 deg copper offset 0,0: 1(4.32,-1.787) 2(-4.32,-1.787)
  oval 1x1.799 hole 0.6 slot 1.4 at 90 deg copper offset 0,0: 3(4.32,2.362) 4(-4.32,2.362)
  rect 0.6x1.15 smd: A1B12(3.2,-2.362) A4B9(2.4,-2.362) B1A12(-3.2,-2.362) B4A9(-2.4,-2.362)
  rect 0.3x1.15 smd: A5(1.25,-2.362) A6(0.25,-2.362) A7(-0.25,-2.362) A8(1.75,-2.362) B5(-1.75,-2.362) B6(-0.75,-2.362) B7(0.75,-2.362) B8(-1.25,-2.362)
  silkscreen extent -4.32,-3.17 4.32,5.08
WS2812-3528 [mm]
  rect 1.6x0.82 smd far side: 1(-2.85,0.75) 2(-2.85,-0.75) 3(2.85,-0.75) 4(2.85,0.75)
  Multi-Layer board cut-out: -1.75,1.35 -1.73,1.425 -1.675,1.48 -1.6,1.5 -1.6,1.5 1.6,1.5 1.675,1.48 1.73,1.425 1.75,1.35 1.75,1.35 1.75,-1.35 1.75,-1.35 1.73,-1.425 1.675,-1.48 1.6,-1.5 1.6,-1.5 1.6,-1.5 -1.6,-1.5 -1.6,-1.5 -1.675,-1.48 -1.73,-1.425 -1.75,-1.35 -1.75,-1.35 -1.75,-1.35 -1.75,1.35

## Free pads (board coordinates)
  oval 314.94x118.11 hole 118.11 slot 314.95 at 0 deg unplated copper offset -0.01,0.01: 3(2207.86,3676.77)
  oval 255.89x137.79 hole 118.11 slot 236.22 at 0 deg copper offset -0.01,0: 3(3135.03,4802.36)
  oval 255.89x137.79 hole 118.11 slot 236.22 at 0 deg: 3(7189.75,4038.18) 3(9616.52,2545.67) 3(12382.26,4802.36)
  oval 314.95x118.11 hole 118.11 slot 314.95 at 0 deg unplated: 3(13298.79,3676.77)

## Via types
v1: diameter 24.02, hole 12.01, Top Layer to Bottom Layer, 583 vias
v2: diameter 35.98, hole 24.02, Top Layer to Bottom Layer, 13 vias

## Nets (pads, with @x,y where several pads share a name; then routed paths per layer and width w, separated by ;. In a path a pad name is that pad's centre, name@x,y a point inside that pad or via, vN(x,y) a via of type N, cw(c..) or ccw(c..) an arc to the next point about the centre after c; other vN are vias at no path point)
COL-0: IC1.36 S1.ROW S15.ROW S29.ROW S56.ROW | length 6722.5
  Top Layer w10: S1.ROW@2403.11,5340.19 2590.51,5152.79 S15.ROW@2590.51,4590.19 2684.21,4496.49 S29.ROW@2684.21,3840.19 2529.1,3685.12 2529.1,2861.82 2496.8,2829.52 S56.ROW@2496.81,2340.2 2635,2201.92 4827.2,2201.92 5132.7,2507.52 v1(5452.4,2507.52)
  Bottom Layer w10: v1(5452.4,2507.52) IC1.36@5841.33,2507.48
COL-1: IC1.37 S2.ROW S42.ROW S57.ROW | length 6272
  Top Layer w10: S2.ROW@3152.71,5340.19 2978.7,5166.22 2978.7,4751.52 3149.2,4581.12 3149.2,3891.32 3096.8,3838.92 3002.4,3838.92 2778.3,3614.92 S42.ROW@2777.91,3090.19 2779.13,3088.97 2779.13,2879.52 3318.46,2340.19 S57.ROW@3434.21,2340.2 3544.1,2230.32 4807.1,2230.32 5116.1,2539.32 v1(5452.4,2539.32)
  Bottom Layer w10: v1(5452.4,2539.32) IC1.37@5841.33,2538.98
COL-2: IC1.40 S3.ROW S16.ROW S30.ROW S43.ROW | length 4769.1
  Top Layer w10: S16.ROW@3527.91,4590.19 3715.31,4402.79 S30.ROW@3715.31,3840.2 3902.71,3652.8 S43.ROW@3902.71,3090.19 v1(4114.58,2878.32) ; S16.ROW@3527.95,4589.36 3527.95,5102.66 3590.55,5165.26 3729.05,5165.26 S3.ROW@3903.14,5339.36
  Bottom Layer w10: v1(4114.58,2878.32) 4807.5,2878.32 5054,2633.42 IC1.40@5841.3,2633.42
COL-3: IC1.38 S4.ROW S17.ROW S31.ROW S44.ROW S58.ROW | length 5136.3
  Top Layer w10: S17.ROW@4277.91,4590.19 4465.31,4402.79 S31.ROW@4465.31,3840.2 4652.71,3652.8 S44.ROW@4652.71,3090.19 4371.61,2809.09 S58.ROW@4371.61,2340.2 4448.8,2263.02 4790.5,2263.02 5097.7,2570.12 v1(5452.4,2570.12) ; S17.ROW@4281.27,4587.62 4281.27,5103.62 4342.95,5165.3 4477.12,5165.3 S4.ROW@4652.75,5340.94
  Bottom Layer w10: v1(5452.4,2570.12) IC1.38@5841.3,2570.42
COL-4: IC1.9 S5.ROW S18.ROW S32.ROW S45.ROW | length 3555.5
  Top Layer w10: S18.ROW@5027.9,4590.19 5215.31,4402.79 S32.ROW@5215.31,3840.19 5403.1,3652.4 S45.ROW@5403.1,3090.19 5528.73,2964.56 v1(6122.82,2964.56) ; S18.ROW@5027.94,4590.57 5028.34,5104.67 5088.64,5164.87 5227.08,5164.87 S5.ROW@5402.75,5340.54
  Bottom Layer w10: v1@6122.8,2964.52 6179.9,2907.42 IC1.9@6179.9,2846.02
COL-5: IC1.1 S6.ROW S19.ROW S33.ROW S46.ROW | length 3205.2
  Top Layer w10: S19.ROW@5777.9,4590.19 5965.31,4402.79 S33.ROW@5965.3,3840.19 6153.1,3652.4 S46.ROW@6153.1,3090.19 6113.73,3050.82 v1(5855.5,3050.82) ; S19.ROW@5777.94,4589.39 5777.94,5103.89 5839.04,5164.89 5978.28,5164.89 S6.ROW@6152.75,5339.36
  Bottom Layer w10: v1(5855.5,3050.82) 5838.2,3033.42 5838.2,2979.92 5926.8,2891.32 5926.8,2847.22 IC1.1@5927.9,2846.02
COL-6: IC1.25 S7.ROW S20.ROW S34.ROW S47.ROW S59.ROW | length 4585.7
  Top Layer w10: v1(6658.3,2299.62) 7143.63,2299.62 S59.ROW@7184.2,2340.2 7184.2,2815.92 S47.ROW@6903.1,3097.02 ; S47.ROW@6903.1,3090.19 6903.1,3652.4 S34.ROW@6715.3,3840.19 6715.31,4402.78 S20.ROW@6527.9,4590.19 6528.7,5105.12 6589,5165.32 6728.23,5165.32 S7.ROW@6903.1,5340.19
  Bottom Layer w10: IC1.25@6179.91,2357.87 6179.9,2314.92 6195.3,2299.62 v1(6658.3,2299.62)
COL-7: IC1.12 S8.ROW S21.ROW S35.ROW S48.ROW | length 4102.5
  Top Layer w10: v1(6855.1,2945.22) 6855.54,2945.66 v1(7002.74,2945.66) ; S21.ROW@7277.9,4590.19 7465.3,4402.79 S35.ROW@7465.3,3840.19 7652.71,3652.78 S48.ROW@7652.7,3090.19 v1(7507.8,2945.22) ; S21.ROW@7277.94,4590.15 7277.94,5103.85 7339.44,5165.25 7478.34,5165.25 S8.ROW@7653.14,5340.15
  Bottom Layer w10: IC1.12@6329.52,2759.45 6451.2,2759.42 6636.9,2945.22 v1(6855.1,2945.22) ; v1@7002.7,2945.22 v1(7507.8,2945.22)
COL-8: IC1.19 S9.ROW S22.ROW S36.ROW S49.ROW | length 5093.3
  Top Layer w10: v1(8229,2916.52) S49.ROW@8402.7,3090.19 8402.7,3652.79 S36.ROW@8215.3,3840.19 8215.3,4402.79 S22.ROW@8027.9,4590.19 8027.5,5105.12 8087.4,5164.92 8227.43,5164.92 S9.ROW@8402.7,5340.19
  Bottom Layer w10: IC1.19@6329.52,2538.98 6886.2,2538.62 6922.8,2575.22 6922.8,2829.52 7009.8,2916.52 v1(8229,2916.52)
COL-9: IC1.20 S10.ROW S23.ROW S37.ROW S50.ROW | length 5855
  Top Layer w10: S23.ROW@8777.9,4590.19 8965.3,4402.79 S37.ROW@8965.3,3840.19 9153.1,3652.39 S50.ROW@9153.09,3090.19 v1(8946.8,2883.82) ; S23.ROW@8777.94,4590.97 8777.94,5106.27 8836.64,5164.87 8976.67,5164.87 S10.ROW@9152.74,5340.94
  Bottom Layer w10: IC1.20@6329.52,2507.48 6899.6,2507.52 6955.1,2563.02 6955.1,2814.52 7024.4,2883.82 v1(8946.8,2883.82)
COL-10: IC1.18 S11.ROW S24.ROW S38.ROW S51.ROW S60.ROW | length 7307.6
  Top Layer w10: S24.ROW@9527.9,4590.19 9715.3,4402.79 S38.ROW@9715.3,3840.19 9902.7,3652.79 S51.ROW@9902.7,3090.19 v1(9902.7,2977.73) S60.ROW@9902.7,2340.19 ; S24.ROW@9527.94,4589.78 9527.14,5105.09 9587.44,5165.28 9728.66,5165.28 S11.ROW@9903.13,5339.76
  Bottom Layer w10: IC1.18@6329.52,2570.47 6873.5,2570.42 6891.3,2588.22 6891.3,2881.92 6987.2,2977.72 v1(9902.7,2977.73)
COL-11: IC1.28 S12.ROW S25.ROW S39.ROW S52.ROW S61.ROW | length 8181.7
  Top Layer w10: v1(6122.43,2269.68) 8997.2,2269.72 9146.4,2418.92 9355.5,2418.92 9506.7,2267.72 10013,2267.72 10084.6,2339.32 S61.ROW@10653.09,2340.2 S52.ROW@10653.09,3090.19 10653.09,3652.4 S39.ROW@10465.3,3840.19 10465.3,4402.79 S25.ROW@10277.89,4590.19 ; S25.ROW@10277.9,4589.72 10277.9,5105.42 10337.8,5165.32 10478.7,5165.32 S12.ROW@10653.1,5339.72
  Bottom Layer w10: IC1.28@6085.42,2357.87 6085.4,2306.72 v1(6122.43,2269.68)
COL-12: IC1.30 S13.ROW S26.ROW S40.ROW S53.ROW S62.ROW | length 9009.4
  Top Layer w10: v1(6070.46,2269.68) 6097.2,2242.92 9001.6,2242.92 9156.7,2398.02 9345.7,2398.02 9497.3,2246.42 11308.9,2246.42 S62.ROW@11402.69,2340.2 S53.ROW@11402.69,3090.19 11402.7,3652.79 S40.ROW@11215.29,3840.19 11215.3,4402.79 S26.ROW@11027.89,4590.19 ; S26.ROW@11027.94,4590.57 11027.14,5103.07 11089.04,5164.87 11227.46,5164.87 S13.ROW@11403.13,5340.54
  Bottom Layer w10: IC1.30@6022.43,2357.87 6022.4,2317.72 v1(6070.46,2269.68)
COL-13: IC1.31 S27.ROW S41.ROW S54.ROW S63.ROW | length 9318.9
  Top Layer w10: v1(6028.34,2269.68) 6077.5,2220.52 9006.7,2220.52 9163.8,2377.52 9335.8,2377.52 9488.1,2225.22 12037.7,2225.22 S63.ROW@12152.69,2340.19 S54.ROW@12152.69,3090.19 12152.7,3558.7 S41.ROW@12434.19,3840.19 12434.2,4372.12 12216.9,4589.32 S27.ROW@11777.89,4590.19
  Bottom Layer w10: IC1.31@5990.93,2357.87 5990.9,2307.12 v1(6028.34,2269.68)
COL-14: IC1.32 S14.ROW S28.ROW S55.ROW S64.ROW | length 10388.5
  Top Layer w10: v1(5980.7,2269.68) 6052,2198.42 9014.1,2198.42 9172.8,2357.12 9327.9,2357.12 9479.9,2205.12 12767.6,2205.12 S64.ROW@12902.69,2340.19 S55.ROW@12902.69,3090.19 12902.69,4402.79 S28.ROW@12715.29,4590.19 12715.29,5152.79 S14.ROW@12527.89,5340.19
  Bottom Layer w10: IC1.32@5959.44,2357.87 5959.4,2290.92 v1(5980.7,2269.68)
D+: IC1.4 R3.1 | length 5120.6
  Top Layer w10: v1(5654.7,4445.22) 5784.2,4315.72 5784.2,3476.42 5905.9,3354.72 v1(5905.9,3105.12)
  Bottom Layer w10: R3.1@2348.42,4529.52 2348.4,4481.92 2385,4445.22 v1(5654.7,4445.22) ; v1(5905.9,3105.12) 6022.4,2988.62 IC1.4@6022.4,2846.02
D-: IC1.3 R4.1 | length 5179.1
  Top Layer w10: v1(5654.7,4409.42) 5737.8,4326.32 5737.8,3473.62 5850.8,3360.62 v1(5850.8,3105.12)
  Bottom Layer w10: R4.1@2253.94,4529.52 2254.3,4481.92 2326.8,4409.42 v1@5653.1,4409.42 ; v1(5850.8,3105.12) 5990.9,2965.02 IC1.3@5990.9,2846.02
GND: C1.1 C2.1 C3.1 C4.1 C5.1 C6.1 C7.1 C8.1 C9.1 C10.1 C11.1 C12.1 C13.1 C14.1 C15.1 C16.1 C17.1 C18.1 C19.1 C20.1 C21.1 C22.1 C23.1 C24.1 C25.1 C26.1 C27.1 C28.1 C29.1 C30.1 C31.1 C32.1 C33.1 C34.1 C35.1 C36.1 C37.1 C38.1 C39.1 C40.1 C41.1 C42.1 C43.1 C44.1 C45.1 C46.1 C47.1 C48.1 C49.1 C50.1 C51.1 C52.1 C53.1 C54.1 C55.1 C56.1 C57.1 C58.1 C59.1 C60.1 C61.1 C62.1 C63.1 C64.1 C65.2 C66.2 C67.1 C68.1 C69.1 C70.1 C71.1 C72.1 E1.1 IC1.5 IC1.15 IC1.23 IC1.35 IC1.43 LED1.3 LED2.3 LED3.3 LED4.3 LED5.3 LED6.3 LED7.3 LED8.3 LED9.3 LED10.3 LED11.3 LED12.3 LED13.3 LED14.3 LED15.3 LED16.3 LED17.3 LED18.3 LED19.3 LED20.3 LED21.3 LED22.3 LED23.3 LED24.3 LED25.3 LED26.3 LED27.3 LED28.3 LED29.3 LED30.3 LED31.3 LED32.3 LED33.3 LED34.3 LED35.3 LED36.3 LED37.3 LED38.3 LED39.3 LED40.3 LED41.3 LED42.3 LED43.3 LED44.3 LED45.3 LED46.3 LED47.3 LED48.3 LED49.3 LED50.3 LED51.3 LED52.3 LED53.3 LED54.3 LED55.3 LED56.3 LED57.3 LED58.3 LED59.3 LED60.3 LED61.3 LED62.3 LED63.3 LED64.3 pad.3@3135.03,4802.36 pad.3@7189.75,4038.18 pad.3@9616.52,2545.67 pad.3@12382.26,4802.36 R2.1 R5.1 R6.1 SW1.1 USB1.1 USB1.2 USB1.3 USB1.4 USB1.A1B12 USB1.B1A12
  other v1: 5641.72,2259.28 5666.29,2259.28 5641.72,2283.85 5666.29,2283.85 5449.17,2361.28 5473.74,2361.28 6600.78,2364.8 6625.35,2364.8 5449.17,2385.85 5473.74,2385.85 6600.78,2389.36 6625.35,2389.36 6118.1,2460.63 6142.67,2460.63 5949.99,2479.38 5949.99,2503.95 6230.31,2592.91 6230.31,2617.48 5949.2,2673.87 6833.45,2676.6 6858.02,2676.6 4656.69,2683.69 4681.26,2683.69 2780.71,2687.63 2805.28,2687.63 3721.65,2687.63 3746.22,2687.63 7465.74,2687.63 7490.31,2687.63 10187.38,2688.42 10211.95,2688.42 10937.38,2687.63 10961.95,2687.63 11688.56,2688.42 11713.13,2688.42 12440.53,2687.63 12465.1,2687.63 13186.59,2693.53 5949.2,2698.44 6833.45,2701.17 6858.02,2701.17 4656.69,2708.26 4681.26,2708.26 2780.71,2712.2 2805.28,2712.2 3721.65,2712.2 3746.22,2712.2 7465.74,2712.2 7490.31,2712.2 10937.38,2712.2 10961.95,2712.2 12440.53,2712.2 12465.1,2712.2 10187.38,2712.99 10211.95,2712.99 11688.56,2712.99 11713.13,2712.99 13186.59,2718.1 3162.2,2750.62 3186.77,2750.62 10375.57,2751.41 10400.14,2751.41 11118.88,2751.41 11143.45,2751.41 11866.12,2751.41 11890.69,2751.41 12622.02,2751.41 12646.59,2751.41 4100.78,2751.8 4125.35,2751.8 9628.33,2751.8 9652.9,2751.8 6029.35,2760.62 6053.92,2760.62 3162.2,2775.19 3186.77,2775.19 4100.78,2776.37 4125.35,2776.37 9628.33,2776.37 9652.9,2776.37 10375.57,2775.98 10400.14,2775.98 11118.88,2775.98 11143.45,2775.98 11866.12,2775.98 11890.69,2775.98 12622.02,2775.98 12646.59,2775.98 2312.87,2825.57 2337.44,2825.57 7004.87,2825.57 7029.44,2825.57 6830.7,2843.14 6855.27,2843.14 5576.76,2845.11 5601.33,2845.11 6506.29,2855.35 6830.7,2867.71 6855.27,2867.71 5576.76,2869.68 5601.33,2869.68 6506.29,2879.92 6410.06,3078.35 6434.63,3078.35 5944.87,3273.85 5969.44,3273.85 5944.87,3298.42 5969.44,3298.42 5689.36,3430.54 5713.93,3430.54 7193.69,3434.48 7218.26,3434.48 4194.48,3436.45 4219.05,3436.45 4945.66,3436.45 4970.23,3436.45 6443.69,3435.66 6468.26,3435.66 7945.66,3436.45 7970.23,3436.45 8689.36,3436.45 8713.93,3436.45 9443.68,3435.66 9468.25,3435.66 10195.65,3435.66 10220.22,3435.66 10943.68,3436.45 10968.25,3436.45 3064.56,3437.63 3089.13,3437.63 11694.47,3437.63 11719.04,3437.63 12436.59,3438.41 12461.16,3438.41 13181.47,3445.5 5689.36,3455.11 7193.69,3459.05 7218.26,3459.05 6443.69,3460.23 6468.26,3460.23 9443.68,3460.23 9468.25,3460.23 10195.65,3460.23 10220.22,3460.23 4194.48,3461.02 4219.05,3461.02 4945.66,3461.02 4970.23,3461.02 7945.66,3461.02 7970.23,3461.02 8689.36,3461.02 8713.93,3461.02 10943.68,3461.02 10968.25,3461.02 3064.56,3462.2 3089.13,3462.2 11694.47,3462.2 11719.04,3462.2 12436.59,3462.98 12461.16,3462.98 13181.47,3470.07 4364.95,3499.83 4389.52,3499.83 3615.35,3501.41 3639.92,3501.41 5116.13,3500.62 5140.7,3500.62 5864.95,3501.41 5889.52,3501.41 7362.98,3500.62 7387.55,3500.62 8113.37,3500.62 8137.94,3500.62 8861.01,3500.62 8885.58,3500.62 9613.37,3501.41 9637.94,3501.41 10364.16,3500.62 10388.73,3500.62 11114.94,3500.62 11139.51,3500.62 12615.73,3501.41 12640.3,3501.41 11870.84,3501.8 11895.41,3501.8 4364.95,3524.4 4389.52,3524.4 5116.13,3525.19 5140.7,3525.19 7362.98,3525.19 7387.55,3525.19 8113.37,3525.19 8137.94,3525.19 8861.01,3525.19 8885.58,3525.19 10364.16,3525.19 10388.73,3525.19 11114.94,3525.19 11139.51,3525.19 3615.35,3525.98 3639.92,3525.98 5864.95,3525.98 5889.52,3525.98 9613.37,3525.98 9637.94,3525.98 11870.84,3526.37 11895.41,3526.37 12615.73,3525.98 12640.3,3525.98 6712.82,3563.38 6737.39,3563.38 2588.58,3577.94 2613.15,3577.94 3383.07,3861.25 3407.64,3861.25 3383.07,3885.82 3407.64,3885.82 2965.35,4176.6 2989.92,4176.6 4000.39,4177.39 4024.96,4177.39 4755.5,4176.6 4780.07,4176.6 5508.65,4176.6 5533.22,4176.6 6256.68,4176.6 6281.25,4176.6 7008.65,4177.39 7033.22,4177.39 7753.53,4176.6 7778.1,4176.6 8502.74,4176.6 8527.31,4176.6 9254.71,4176.6 9279.28,4176.6 10001.56,4176.6 10026.13,4176.6 10754.71,4176.6 10779.28,4176.6 11506.67,4176.6 11531.24,4176.6 12728.72,4182.51 12753.29,4182.51 2965.35,4201.17 2989.92,4201.17 4755.5,4201.17 4780.07,4201.17 5508.65,4201.17 5533.22,4201.17 6256.68,4201.17 6281.25,4201.17 7753.53,4201.17 7778.1,4201.17 8502.74,4201.17 8527.31,4201.17 9254.71,4201.17 9279.28,4201.17 10001.56,4201.17 10026.13,4201.17 10754.71,4201.17 10779.28,4201.17 11506.67,4201.17 11531.24,4201.17 4000.39,4201.96 4024.96,4201.96 7008.65,4201.96 7033.22,4201.96 12728.72,4207.08 12753.29,4207.08 4975.18,4251.41 6440.15,4250.62 6464.72,4250.62 7183.06,4251.4 7207.63,4251.4 8681.48,4251.4 8706.05,4251.4 10181.48,4251.4 10206.05,4251.4 10928.72,4251.4 10953.29,4251.4 12160.21,4250.62 12184.78,4250.62 3433.07,4251.8 3457.64,4251.8 7926.76,4251.8 7951.33,4251.8 9426.76,4251.8 9451.33,4251.8 4185.43,4252.59 4210,4252.59 5690.15,4252.59 5714.72,4252.59 6440.15,4275.19 6464.72,4275.19 12160.21,4275.19 12184.78,4275.19 3433.07,4276.37 3457.64,4276.37 4975.18,4275.98 7183.06,4275.97 7207.63,4275.97 7926.76,4276.37 7951.33,4276.37 8681.48,4275.97 8706.05,4275.97 9426.76,4276.37 9451.33,4276.37 10181.48,4275.97 10206.05,4275.97 10928.72,4275.97 10953.29,4275.97 4185.43,4277.16 4210,4277.16 5690.15,4277.16 5714.72,4277.16 2496.85,4330.54 2521.42,4330.54 2386.61,4823.84 2386.61,4848.41 2875.59,4926.6 2900.16,4926.6 3817.71,4926.6 3842.28,4926.6 4563.38,4927.39 4587.95,4927.39 5313.38,4926.6 5337.95,4926.6 6061.41,4926.6 6085.98,4926.6 6816.52,4926.6 6841.09,4926.6 7564.55,4926.6 7589.12,4926.6 8315.73,4926.6 8340.3,4926.6 9062.58,4926.6 9087.15,4926.6 9816.52,4927.39 9841.09,4927.39 10565.73,4926.6 10590.3,4926.6 11320.45,4927.39 11345.02,4927.39 12068.48,4926.6 12093.05,4926.6 13006.67,4938.41 13031.24,4938.41 2875.59,4951.17 2900.16,4951.17 3817.71,4951.17 3842.28,4951.17 5313.38,4951.17 5337.95,4951.17 6061.41,4951.17 6085.98,4951.17 6816.52,4951.17 6841.09,4951.17 7564.55,4951.17 7589.12,4951.17 8315.73,4951.17 8340.3,4951.17 9062.58,4951.17 9087.15,4951.17 10565.73,4951.17 10590.3,4951.17 12068.48,4951.17 12093.05,4951.17 4563.38,4951.96 4587.95,4951.96 9816.52,4951.96 9841.09,4951.96 11320.45,4951.96 11345.02,4951.96 13006.67,4962.98 13031.24,4962.98 11490.14,5000.62 11514.71,5000.62 3224.8,5001.8 3249.37,5001.8 4745.66,5001.8 4770.23,5001.8 5483.46,5001.8 5508.03,5001.8 8490.14,5001.8 8514.71,5001.8 12419.27,5001.8 12443.84,5001.8 3992.51,5002.98 4017.08,5002.98 6241.33,5002.98 6265.9,5002.98 6983.45,5002.98 7008.02,5002.98 7741.33,5002.98 7765.9,5002.98 9241.32,5002.98 9265.89,5002.98 9988.17,5002.98 10012.74,5002.98 10741.32,5002.98 10765.89,5002.98 11490.14,5025.19 11514.71,5025.19 3224.8,5026.37 3249.37,5026.37 4745.66,5026.37 4770.23,5026.37 5483.46,5026.37 5508.03,5026.37 8490.14,5026.37 8514.71,5026.37 12419.27,5026.37 12443.84,5026.37 3992.51,5027.55 4017.08,5027.55 6241.33,5027.55 6265.9,5027.55 6983.45,5027.55 7008.02,5027.55 7741.33,5027.55 7765.9,5027.55 9241.32,5027.55 9265.89,5027.55 9988.17,5027.55 10012.74,5027.55 10741.32,5027.55 10765.89,5027.55 2180.55,5069.28 2205.12,5069.28 2405.74,5076.38 2430.31,5076.38 2180.55,5093.85 2205.12,5093.85 3734.09,5313.37 3758.66,5313.37 3734.09,5337.94 3758.66,5337.94 6442.12,5675.42 6466.69,5675.42 7943.69,5675.42 7968.26,5675.42 8690.93,5675.42 8715.5,5675.42 9438.96,5675.42 9463.53,5675.42 10940.93,5675.42 10965.5,5675.42 11690.92,5675.42 11715.49,5675.42 4185.43,5676.21 4210,5676.21 4937,5676.21 4961.57,5676.21 10188.96,5676.21 10213.53,5676.21 3435.43,5676.99 3460,5676.99 5690.94,5677.39 5715.51,5677.39 7193.69,5676.99 7218.26,5676.99 12820.06,5692.74 12844.63,5692.74 6442.12,5699.99 6466.69,5699.99 7943.69,5699.99 7968.26,5699.99 8690.93,5699.99 8715.5,5699.99 9438.96,5699.99 9463.53,5699.99 10940.93,5699.99 10965.5,5699.99 11690.92,5699.99 11715.49,5699.99 4185.43,5700.78 4210,5700.78 4937,5700.78 4961.57,5700.78 10188.96,5700.78 10213.53,5700.78 3435.43,5701.56 3460,5701.56 5690.94,5701.96 5715.51,5701.96 7193.69,5701.56 7218.26,5701.56 12820.06,5717.31 12844.63,5717.31 12291.32,5735.03 6611.01,5749.43 6635.58,5749.43 3616.92,5750.61 3641.49,5750.61 7363.37,5751.4 7387.94,5751.4 8112.58,5751.4 8137.15,5751.4 10369.27,5751.4 10393.84,5751.4 4360.23,5752.19 4384.8,5752.19 5114.4,5751.57 5138.97,5751.57 5859.44,5752.19 5884.01,5752.19 9615.34,5752.19 9639.91,5752.19 11111.79,5752.19 11136.36,5752.19 8863.37,5752.98 8887.94,5752.98 2802.75,5762.98 2918.11,5762.98 6611.01,5774 6635.58,5774 3616.92,5775.18 3641.49,5775.18 5114.4,5776.14 5138.97,5776.14 7363.37,5775.97 7387.94,5775.97 8112.58,5775.97 8137.15,5775.97 10369.27,5775.97 10393.84,5775.97 4360.23,5776.76 4384.8,5776.76 5859.44,5776.76 5884.01,5776.76 9615.34,5776.76 9639.91,5776.76 11111.79,5776.76 11136.36,5776.76 8863.37,5777.55 8887.94,5777.55 2199.6,5825.57 2224.17,5825.57 2199.6,5850.14 2224.17,5850.14 3268.5,5859.67 3293.07,5859.67 3268.5,5884.24 3293.07,5884.24
IC1_6: C67.2 IC1.6 | length 469.9
  Bottom Layer w10: C67.2@5878.73,3230.31 6085.4,3023.62 IC1.6@6085.4,2846.02
IC1_13: IC1.13 R1.1 SW1.2 | length 4883.4
  Top Layer w10: v1(3503.54,3822.43) 3503.5,3723.62 v1(3561,3665.32) ; v1(6599.6,3665.72) 6640.5,3624.82 6640.5,3054.72 6674.4,3020.82 v1(6674.4,2911.41)
  Bottom Layer w10: SW1.2@3260.63,4065.75 3455.9,4065.32 3503.5,4017.72 v1(3503.54,3822.43) ; v1@3561,3665.72 v1(6599.6,3665.72) ; IC1.13@6329.52,2727.95 6490.9,2727.92 v1(6674.4,2911.41)
IC1_16: C66.1 IC1.16 X1.1 | length 517
  Bottom Layer w10: IC1.16@6329.52,2633.47 6507.8,2633.52 X1.1@6655.48,2781.11 C66.1@6785.43,2781.1
IC1_17: C65.1 IC1.17 X1.2 | length 466.2
  Bottom Layer w10: IC1.17@6329.5,2601.92 6538.6,2601.92 6563.4,2626.72 6655.5,2626.72 C65.1@6785.43,2625.98
IC1_33: IC1.33 R2.2 | length 177.3
  Bottom Layer w10: R2.2@5786.21,2272.05 5842.1,2272.02 IC1.33@5927.94,2357.87
LED1_4: LED1.4 LED2.2 | length 587.8
  Top Layer w10: v1(2613.39,5765.74) 2654,5806.32 3043.3,5806.32 v1@3143,5706.52
  other v1: 3143.04,5706.56
LED2_4: LED2.4 LED3.2 | length 550.4
  Bottom Layer w10: LED2.4@3367.5,5765.62 3474,5765.62 3533.1,5706.52 LED3.2@3893.4,5706.52
LED3_4: LED3.4 LED4.2 | length 549.7
  Bottom Layer w10: LED3.4@4117.84,5765.62 4224.8,5765.62 4283.9,5706.52 LED4.2@4643,5706.52
LED4_4: LED4.4 LED5.2 | length 550
  Bottom Layer w10: LED4.4@4867.5,5765.62 4974.8,5765.62 5033.8,5706.52 LED5.2@5393,5706.52
LED5_4: LED5.4 LED6.2 | length 550.1
  Bottom Layer w10: LED5.4@5617.44,5765.62 5724,5765.62 5783.1,5706.52 LED6.2@6143,5706.52
LED6_4: LED6.4 LED7.2 | length 550.5
  Bottom Layer w10: LED6.4@6367.44,5765.62 6475.2,5765.62 6534.2,5706.52 LED7.2@6893.4,5706.52
LED7_4: LED7.4 LED8.2 | length 550.1
  Bottom Layer w10: LED7.4@7117.84,5765.62 7225.2,5765.62 7284.2,5706.52 LED8.2@7643.4,5706.52
LED8_4: LED8.4 LED9.2 | length 549.7
  Bottom Layer w10: LED8.4@7867.83,5765.62 7975.2,5765.62 8034.2,5706.52 LED9.2@8393,5706.52
LED9_4: LED9.4 LED10.2 | length 550.1
  Bottom Layer w10: LED9.4@8617.43,5765.62 8725.2,5765.62 8784.2,5706.52 LED10.2@9143,5706.52
LED10_4: LED10.4 LED11.2 | length 550.5
  Bottom Layer w10: LED10.4@9367.44,5765.62 9474,5765.62 9533.1,5706.52 LED11.2@9893.4,5706.52
LED11_4: LED11.4 LED12.2 | length 550.1
  Bottom Layer w10: LED11.4@10117.83,5765.62 10225.2,5765.62 10284.2,5706.52 LED12.2@10643.4,5706.52
LED12_4: LED12.4 LED13.2 | length 550.1
  Bottom Layer w10: LED12.4@10867.83,5765.62 10975.2,5765.62 11034.2,5706.52 LED13.2@11393.4,5706.52
LED13_4: LED13.4 LED14.2 | length 921.6
  Bottom Layer w10: LED13.4@11617.82,5765.62 11724.8,5765.62 11783.8,5706.52 LED14.2@12514.9,5706.52
LED14_4: LED14.4 LED15.2 | length 12244.2
  Bottom Layer w10: LED15.2@2577.56,4956.69 2400,4956.72 2364.6,4992.12 2364.6,5075.62 2406.3,5117.32 13186.6,5117.32 13258.6,5189.32 13258.6,5588.62 13177.1,5670.02 12979.1,5670.02 12883.6,5765.62 LED14.4@12739.34,5765.62
LED15_4: LED15.4 LED16.2 | length 740.6
  Bottom Layer w10: LED15.4@2801.97,5015.74 2913.4,5015.72 2972.4,4956.72 LED16.2@3518.24,4956.69
LED16_4: LED16.4 LED17.2 | length 550
  Bottom Layer w10: LED16.4@3742.64,5015.74 3850,5015.72 3909.1,4956.72 LED17.2@4268.24,4956.69
LED17_4: LED17.4 LED18.2 | length 550
  Bottom Layer w10: LED17.4@4492.64,5015.74 4600,5015.72 4659.1,4956.72 LED18.2@5018.23,4956.69
LED18_4: LED18.4 LED19.2 | length 550
  Bottom Layer w10: LED18.4@5242.64,5015.74 5350,5015.72 5409,4956.72 LED19.2@5768.23,4956.69
LED19_4: LED19.4 LED20.2 | length 550
  Bottom Layer w10: LED19.4@5992.64,5015.74 6100.8,5015.72 6159.8,4956.72 LED20.2@6518.23,4956.69
LED20_4: LED20.4 LED21.2 | length 550
  Bottom Layer w10: LED20.4@6742.64,5015.74 6850,5015.72 6909,4956.72 LED21.2@7268.23,4956.69
LED21_4: LED21.4 LED22.2 | length 550
  Bottom Layer w10: LED21.4@7492.64,5015.74 7600.8,5015.72 7659.8,4956.72 LED22.2@8018.23,4956.69
LED22_4: LED22.4 LED23.2 | length 550
  Bottom Layer w10: LED22.4@8242.63,5015.74 8350,5015.72 8409,4956.72 LED23.2@8768.23,4956.69
LED23_4: LED23.4 LED24.2 | length 550
  Bottom Layer w10: LED23.4@8992.64,5015.74 9100,5015.72 9159,4956.72 LED24.2@9518.23,4956.69
LED24_4: LED24.4 LED25.2 | length 550
  Bottom Layer w10: LED24.4@9742.63,5015.74 9850.8,5015.72 9909.8,4956.72 LED25.2@10268.22,4956.69
LED25_4: LED25.4 LED26.2 | length 550
  Bottom Layer w10: LED25.4@10492.63,5015.74 10600.8,5015.72 10659.8,4956.72 LED26.2@11018.22,4956.69
LED26_4: LED26.4 LED27.2 | length 550
  Bottom Layer w10: LED26.4@11242.63,5015.74 11350.8,5015.72 11409.8,4956.72 LED27.2@11768.23,4956.69
LED27_4: LED27.4 LED28.2 | length 734.1
  Bottom Layer w10: LED27.4@11992.63,5015.74 12100,5015.72 12159,4956.72 LED28.2@12702.34,4956.69
LED28_4: LED28.4 LED29.2 | length 12055
  Bottom Layer w10: LED29.2@2671.2,4206.52 2494.2,4206.52 2459.1,4241.72 2459.1,4338.92 2496.4,4376.32 11896.8,4376.32 11965.7,4445.22 12153.1,4445.22 12222,4376.32 12799.6,4376.32 12869.7,4446.42 13207.8,4446.42 13259.4,4498.02 13259.4,4942.92 13186.6,5015.72 LED28.4@12926.74,5015.74
LED29_4: LED29.4 LED30.2 | length 834.5
  Bottom Layer w10: LED29.4@2895.61,4265.62 3005.9,4265.62 3065,4206.52 LED30.2@3705.6,4206.52
LED30_4: LED30.4 LED31.2 | length 550
  Bottom Layer w10: LED30.4@3930.1,4265.62 4038.6,4265.62 4097.6,4206.52 LED31.2@4455.6,4206.52
LED31_4: LED31.4 LED32.2 | length 550
  Bottom Layer w10: LED31.4@4680.1,4265.62 4786.2,4265.62 4845.3,4206.52 LED32.2@5205.6,4206.52
LED32_4: LED32.4 LED33.2 | length 550.1
  Bottom Layer w10: LED32.4@5430.04,4265.62 5537.4,4265.62 5596.5,4206.52 LED33.2@5955.6,4206.52
LED33_4: LED33.4 LED34.2 | length 550.1
  Bottom Layer w10: LED33.4@6180.04,4265.62 6288.6,4265.62 6347.6,4206.52 LED34.2@6705.6,4206.52
LED34_4: LED34.4 LED35.2 | length 550.1
  Bottom Layer w10: LED34.4@6930.04,4265.62 7038.6,4265.62 7097.6,4206.52 LED35.2@7455.6,4206.52
LED35_4: LED35.4 LED36.2 | length 550.1
  Bottom Layer w10: LED35.4@7680.03,4265.62 7787.4,4265.62 7846.4,4206.52 LED36.2@8205.6,4206.52